# Altium PCB ADCMultiplexerFrontEnd.PcbDoc
Units mm, origin at the board's own origin, x right, y up, seen from the top; angles counter-clockwise.
Board outline 30 x 60 mm, 2 copper layers (Top Layer, Bottom Layer); 20 components, 46 nets, 152 pads, 73 vias.
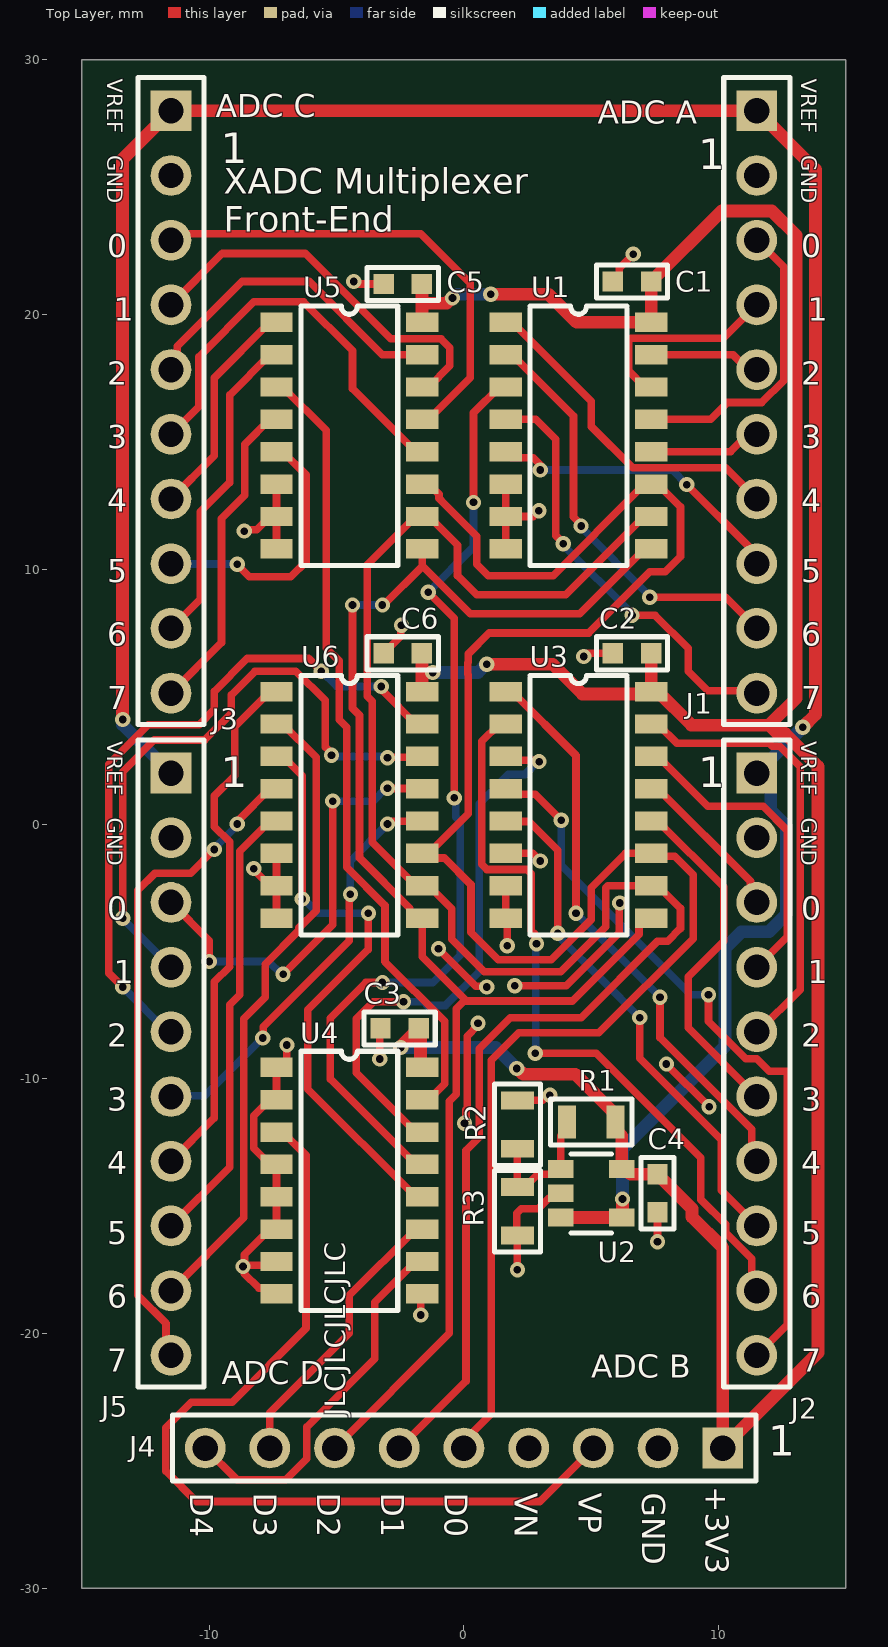
[diagram p0: Top Layer view]
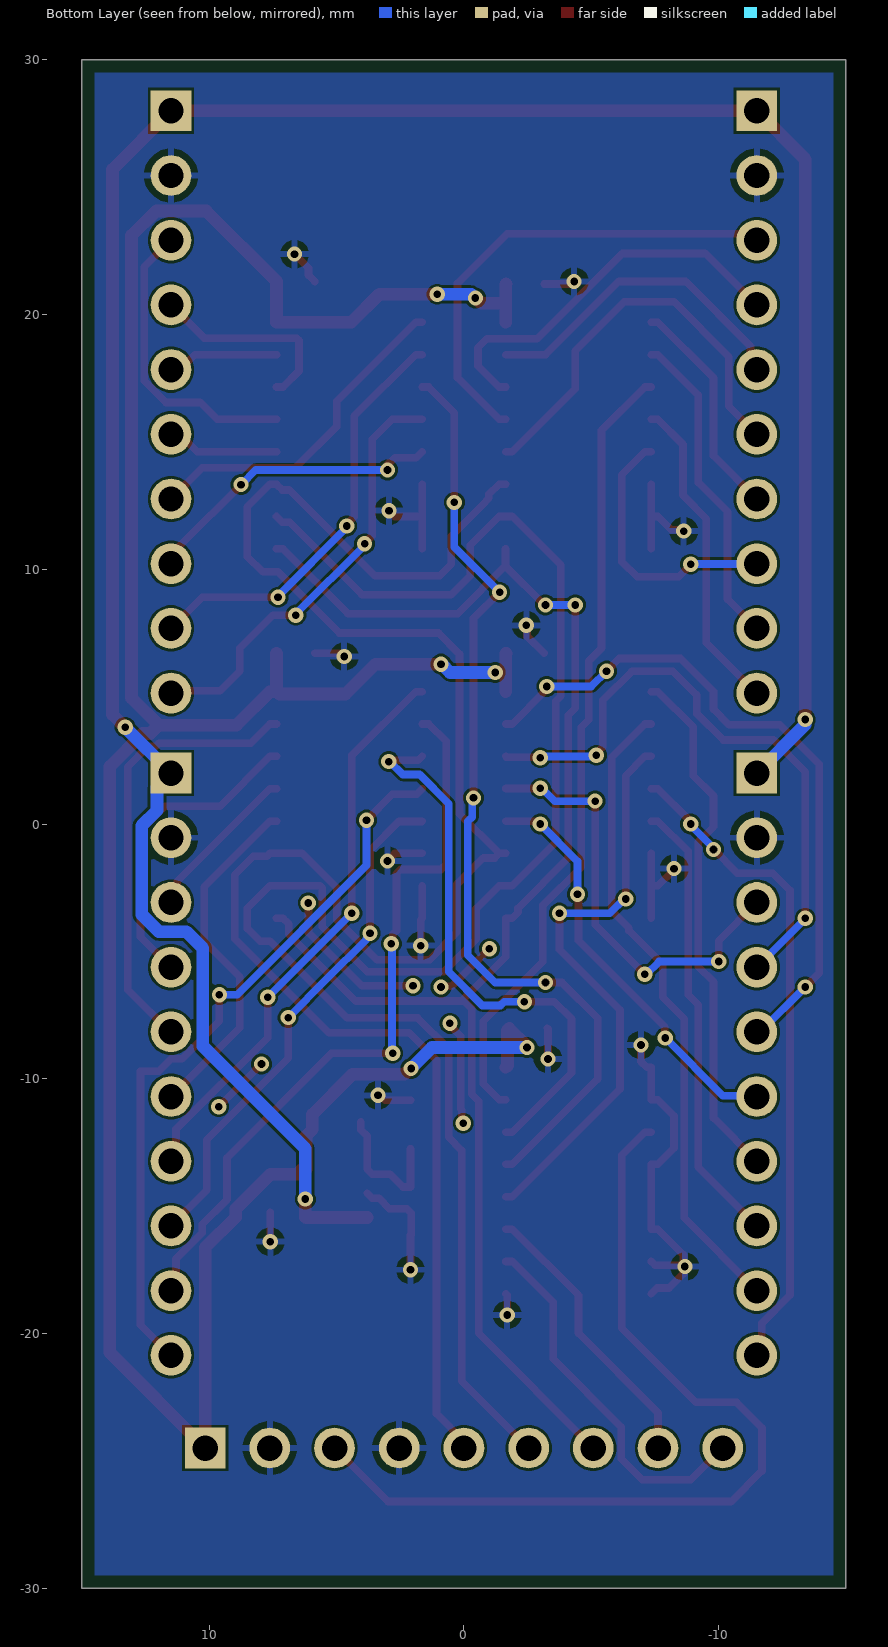
[diagram p1: Bottom Layer view, seen from below]

## Layer stack, top to bottom
Top Solder: solder mask 0.0102, Solder Resist, Dk 3.5
Top Layer: signal copper 0.0356
Dielectric 1: dielectric 0.32, FR-4, Dk 4.8
Bottom Layer: signal copper 0.0356
Bottom Solder: solder mask 0.0102, Solder Resist, Dk 3.5

## Board outline
-15,-30 15,-30 15,30 -15,30

## Design rules (kind name [scope] priority, off if disabled: settings)
Clearance [All] p1: gap=0.1 ignorepadtopadclearanceinfootprint=FALSE
HoleToHoleClearance [All] p1: gap=0.1 allowstackedmicrovias=TRUE
MinimumSolderMaskSliver [All] p1: minsoldermaskwidth=0.1
PolygonConnect [All] p1: connectstyle=Relief reliefconductorwidth=0.254 reliefentries=4 polygonreliefangle="90 Angle" airgapwidth=0.254
RoutingVias [All] p1: holewidth=0.3 width=0.6 viastyle="Through Hole" minholewidth=0.3 minwidth=0.6 maxholewidth=0.3 maxwidth=0.6
SilkToSilkClearance [All] p1: silktosilkclearance=0.1
SilkToSolderMaskClearance [IsPad] p1: minsilkscreentomaskgap=0.15 clearancetoexposedcopper=TRUE
SolderMaskExpansion [All] p1: expansion=0.102 istentingtop=FALSE
Width WidthPower [InNet('+3V3') or InNet('+1VREF')] p1: maxlimit=1 minlimit=0.5 preferedwidth=0.5 minimp=50.000000 maximp=50.000000 favimp=50.000000
Width [All] p2: maxlimit=0.5 minlimit=0.3 preferedwidth=0.3 minimp=50.000000 maximp=50.000000 favimp=50.000000
26 further rules are at their usual default settings.

## Components (designator, comment, footprint, x,y, rotation, side; value= is the part's Value field where it differs from the comment)
C1 "100n" C0603 6.6,21.3 r0 top
C2 "100n" C0603 6.6,6.7 r0 top
C3 "100n" C0603 -2.525,-8.025 r0 top
C4 "100n" C0603 7.6,-14.5 r90 top
C5 "100n" C0603 -2.4,21.2 r0 top
C6 "100n" C0603 -2.4,6.7 r0 top
J1 "HDR M 1x8 2.54MM" "HDR M 1x10 2.54MM" 11.5,28 r0 top
J2 "HDR M 1x8 2.54MM" "HDR M 1x10 2.54MM" 11.5,2 r0 top
J3 "HDR M 1x8 2.54MM" "HDR M 1x10 2.54MM" -11.5,28 r0 top
J4 "HDR M 1x8 2.54MM" "HDR M 1x9 2.54MM" 10.16,-24.5 r270 top
J5 "HDR M 1x8 2.54MM" "HDR M 1x10 2.54MM" -11.5,2 r0 top
R1 "22k" R0805 5,-11.7 r0 top
R2 "10k" R0805 2.1,-11.8 r270 top
R3 "220k" R0805 2.1,-15.2 r90 top
U1 "74HC4051D,652" SOIC16 4.5,15.25 r0 top
U2 "LMV321SN3T1G" TSOP5 5,-14.5 r0 top
U3 "74HC4051D,652" SOIC16 4.5,0.75 r0 top
U4 "74HC4051D,652" SOIC16 -4.5,-14 r0 top
U5 "74HC4051D,652" SOIC16 -4.5,15.25 r0 top
U6 "74HC4051D,652" SOIC16 -4.5,0.75 r0 top

## Footprints (in the part's own frame and the unit in brackets; to place one, negate y for a bottom-side part, rotate by r counter-clockwise, add the part's x,y. Pads: shape width x height; smd on the part's side, far side on the other; paste and mask are expansions set on the pad)
C0603 [mm]
  rect 0.8x0.8 smd: 1(-0.75,0) 2(0.75,0)
  silkscreen extent -1.4,-0.65 1.4,0.65, body extent -0.8,-0.4 0.8,0.4, height 0.96
"HDR M 1x9 2.54MM" [mm]
  rect 1.6x1.6 hole 1: 1(0,0)
  round 1.6 hole 1: 2(0,-2.54) 3(0,-5.08) 4(0,-7.62) 5(0,-10.16) 6(0,-12.7) 7(0,-15.24) 8(0,-17.78) 9(0,-20.32)
  silkscreen extent -1.3,-21.6 1.3,1.3, body extent -1.27,-21.59 1.27,1.27, height 9.21
"HDR M 1x10 2.54MM" [mm]
  rect 1.6x1.6 hole 1: 1(0,0)
  round 1.6 hole 1: 2(0,-2.54) 3(0,-5.08) 4(0,-7.62) 5(0,-10.16) 6(0,-12.7) 7(0,-15.24) 8(0,-17.78) 9(0,-20.32) 10(0,-22.86)
  silkscreen extent -1.3,-24.1 1.3,1.3, body extent -1.27,-24.1 1.27,1.27, height 9.21
R0805 [mm]
  rect 0.7x1.3 smd: 1(-0.95,0) 2(0.95,0)
  silkscreen extent -1.6,-0.9 1.6,0.9, body extent -1,-0.6 1,0.6, height 0.61
SOIC16 [mm]
  rect 1.27x0.76 smd: 1(-2.86,4.445) 2(-2.86,3.175) 3(-2.86,1.905) 4(-2.86,0.635) 5(-2.86,-0.635) 6(-2.86,-1.905) 7(-2.86,-3.175) 8(-2.86,-4.445) 9(2.86,-4.445) 10(2.86,-3.175) 11(2.86,-1.905) 12(2.86,-0.635) 13(2.86,0.635) 14(2.86,1.905) 15(2.86,3.175) 16(2.86,4.445)
  silkscreen extent -1.9,-5.1 1.9,5.08, body extent -3,-4.95 3,4.95, height 1.4
TSOP5 [mm]
  rect 1x0.7 smd mask+0.14: 1(-1.2,0.95) 2(-1.2,0) 3(-1.2,-0.95)
  rect 1x0.7 smd: 4(1.2,-0.95) 5(1.2,0.95)
  silkscreen extent -0.8,-1.55 0.8,1.55, body extent -1.41,-1.48 1.4,1.47, height 1.01

## Part data
C1 C2 C3 C4 C5 C6: library part C0603KC0G100V104
J1 J2 J3 J5: library part "HDR M 1x10 2.54MM"
J4: library part "HDR M 1x9 2.54MM"
R1: library part R0805F22K
R2: library part R0805F10K
R3: library part R0805F220K
U1 U3 U4 U5 U6: "IC MUX/DEMUX 8X1 16SOIC", Manufacturer=Nexperia, Supplier Part Number 1=1697756, Category="Decoders and Multiplexers", ComponentLink1Description=https://assets.nexperia.com/documents/data-sheet/74HC_HCT4051.pdf?src-supplier=Digi-Key, ComponentLink1URL=https://assets.nexperia.com/documents/data-sheet/74HC_HCT4051.pdf?src-supplier=Digi-Key, Manufacturer Part Number=74HC4051D,652, Pricing 1="1=0.52000, 70=0.49300, 100=0.47900, 250=0.43800, 500=0.42400 (USD)", RoHS=Yes, RoHS Compliant=Yes, Stock 1=155, Supplier 1=RSComponents
U2: "ON SEMICONDUCTOR - LMV321SN3T1G - OP-AMP, SINGLE, 1MHZ, 1V/US, TSOP-5", Case/Package=TSOP, Input Bias Current=1nA, Input Offset Voltage (Vos)=9mV, Manufacturer="ON Semiconductor", Max Operating Temperature=85°C, Max Supply Voltage=5V, Min Operating Temperature=-40°C, Min Supply Voltage=2.7V, Nominal Supply Current=250uA, Operating Supply Current=130uA, Operating Supply Voltage=3V, Output Current=160mA, Package Quantity=3000, Power Supply Rejection Ratio (PSRR)=50dB, Supplier Part Number 1=7878661, Voltage Gain=100dB, Amplifier Type="GENERAL PURPOSE", Category="Amplifiers - Op Amps, Buffer, Instrumentation", Common Mode Rejection Ratio=50dB, ComponentLink1Description=https://datasheet.ciiva.com/30481/0900766b81267f93-30481486.pdf?src-supplier=RSComponents, ComponentLink1URL=https://datasheet.ciiva.com/30481/0900766b81267f93-30481486.pdf?src-supplier=RSComponents, ComponentLink2Description=https://datasheet.ciiva.com/6627/lmv321-lmv358-lmv324-d-6627357.pdf?src-supplier=Digi-Key, ComponentLink2URL=https://datasheet.ciiva.com/6627/lmv321-lmv358-lmv324-d-6627357.pdf?src-supplier=Digi-Key, ComponentLink3Description=https://datasheet.ciiva.com/11710/lmv321-lmv358-lmv324-d-11710749.pdf?src-supplier=Avnet, ComponentLink3URL=https://datasheet.ciiva.com/11710/lmv321-lmv358-lmv324-d-11710749.pdf?src-supplier=Avnet, ComponentLink4Description=https://datasheet.ciiva.com/16456/lmv321-lmv358-lmv324-d-16456749.pdf?src-supplier=Future+Electronics, ComponentLink4URL=https://datasheet.ciiva.com/16456/lmv321-lmv358-lmv324-d-16456749.pdf?src-supplier=Future+Electronics, ComponentLink5Description=https://datasheet.ciiva.com/6627/lmv321-lmv358-lmv324-d-6627359.pdf?src-supplier=Digi-Key, ComponentLink5URL=https://datasheet.ciiva.com/6627/lmv321-lmv358-lmv324-d-6627359.pdf?src-supplier=Digi-Key, Contact Plating=Tin,Matte, Gain Bandwidth Product=1MHz, Halogen Free="Halogen Free", Height=1mm, Input Offset Voltage-Max=9mV, Lead Free="Lead Free", Length=3mm, Manufacturer Part Number=LMV321SN3T1G, Nominal Gain Bandwidth Product=1MHz, Number of Channels=1, Number of Circuits=1, Number of Elements=1, Number of Pins=5, Output Current per Channel=160mA, Packaging="Tape and Reel", Pricing 1="20=0.11000, 100=0.21500, 1000=0.15900, 3000=0.14200, 9000=0.14000 (USD)", Radiation Hardening=No, RoHS=Yes, RoHS Compliant=Yes, Series=-, Slew Rate=1V/µs, Slew Rate-Nom=1V/µs, Stock 1=3580, Supplier 1=RSComponents, Supply Current=250uA, Technology=CMOS, Unity Gain Bandwidth Product=1MHz, Width=1.5mm

## Via types
v1: diameter 0.6, hole 0.3, Top Layer to Bottom Layer, tented both sides, 73 vias

## Nets (pads, with @x,y where several pads share a name; then routed paths per layer and width w, separated by ;. In a path a pad name is that pad's centre, name@x,y a point inside that pad or via, vN(x,y) a via of type N, cw(c..) or ccw(c..) an arc to the next point about the centre after c; other vN are vias at no path point)
+1VREF: J1.1 J2.1 J3.1 J5.1 U2.3 U2.4 | length 102.1
  Top Layer w0.5: v1(-13.4,4.1) -13.4,26.1 J3.1 J1.1 13.8,25.7 13.8,4.3 v1(13.3,3.8) ; U2.3 U2.4 6.225,-15.425 v1(6.225,-14.725)
  Bottom Layer w0.5: v1(-13.4,4.1) -13.4,3.9 J5.1 ; v1(6.225,-14.725) 6.225,-12.75 10.25,-8.725 10.25,-4.877 10.897,-4.23 11.976,-4.23 12.65,-3.556 12.65,-0.064 12.05,0.536 12.05,1.45 J2.1 v1(13.3,3.8)
+3V3: C1.2 C2.2 C3.2 C4.2 C5.2 C6.2 J4.1 R1.2 U1.16 U2.5 U3.16 U4.16 U5.16 U6.16 | length 116.1
  Top Layer w0.5: v1(-2.475,-8.775) -2.456,-8.756 -2.456,-8.706 C3.2 -1.707,-8.093 -1.707,-9.487 U4.16 ; C6.2 -1.645,6.695 -1.645,5.95 ; C5.2 -1.645,21.195 -1.645,20.447 ; U6.16 -1.645,5.2 -1.645,5.947 -1.228,5.947 v1(-1.225,5.95) ; U5.16 -1.645,19.7 -1.645,20.447 ; v1(-0.45,20.65) -0.477,20.65 -0.68,20.447 -1.645,20.447 ; v1(0.9,6.275) 3.475,6.275 4.65,5.1 7.255,5.1 7.355,5.2 7.355,6.695 C2.2 ; v1(1.05,20.8) 3.322,20.8 4.427,19.695 U1.16 7.355,19.7 7.355,21.295 C1.2 10.12,24.07 12.082,24.07 13.05,23.102 13.05,4.95 11.982,3.882 ; v1(2.075,-9.6) 2.102,-9.6 2.327,-9.825 4.375,-9.825 5.95,-11.4 R1.2 5.95,-12 6.2,-12.25 U2.5 6.35,-13.55 6.55,-13.75 C4.2 8.955,-15.105 8.955,-15.427 10.16,-16.632 J4.1 13.9,-20.76 13.9,2.261 12.611,3.55 12.314,3.55 11.982,3.882 ; U3.16 7.615,5.195 8.928,3.882 11.982,3.882
  Bottom Layer w0.5: v1(-2.475,-8.775) 1.25,-8.775 v1(2.075,-9.6) ; v1(-1.225,5.95) 0.548,5.95 0.873,6.275 v1(0.9,6.275) ; v1(-0.45,20.65) -0.423,20.65 -0.273,20.8 v1(1.05,20.8)
ADC_A0: J1.3 U1.13 | length 11.8
  Top Layer w0.3: U1.13 9.685,15.885 10.35,16.55 11.699,16.55 12.55,17.401 12.55,21.87 J1.3
ADC_A1: J1.4 U1.14 | length 7.9
  Top Layer w0.3: U1.14 7.105,17.155 6.475,17.785 6.475,18.982 6.558,19.065 10.185,19.065 J1.4
ADC_A2: J1.5 U1.15 | length 4.4
  Top Layer w0.3: U1.15 10.563,18.425 11.148,17.84 J1.5
ADC_A3: J1.6 U1.12 | length 4.4
  Top Layer w0.3: U1.12 10.463,14.615 11.148,15.3 J1.6
ADC_A4: J1.7 U1.1 | length 13.3
  Top Layer w0.3: U1.1 1.895,19.695 5,16.59 5,15.606 6.621,13.985 10.275,13.985 J1.7
ADC_A5: J1.8 U1.5 | length 12
  Top Layer w0.3: U1.5 1.87,14.385 2.715,14.385 3,14.1 v1(3,13.9) ; v1(8.75,13.325) 11.094,10.981 11.094,10.978 11.5,10.572 J1.8
  Bottom Layer w0.3: v1(3,13.9) 8.175,13.9 v1(8.75,13.325)
ADC_A6: J1.9 U1.2 | length 16.7
  Top Layer w0.3: U1.2 1.895,18.425 4.3,16.02 4.3,12.066 4.6,11.766 v1(4.6,11.7) ; v1(7.3,8.9) 10.28,8.9 J1.9
  Bottom Layer w0.3: v1(4.6,11.7) 4.6,11.65 7.3,8.95 v1(7.3,8.9)
ADC_A7: J1.10 U1.4 | length 17.1
  Top Layer w0.3: U1.4 2.815,15.885 3.6,15.1 3.6,11.326 3.9,11.026 v1(3.9,11) ; v1(6.6,8.2) 7.5,8.2 8.8,6.9 8.8,6 9.575,5.225 11.415,5.225 J1.10
  Bottom Layer w0.3: v1(3.9,11) 3.9,10.95 6.6,8.25 v1(6.6,8.2)
ADC_B0: J2.3 U3.13 | length 6.3
  Top Layer w0.3: U3.13 7.615,1.385 11.251,-2.251 11.251,-2.831 J2.3
ADC_B1: J2.4 U3.14 | length 12.4
  Top Layer w0.3: U3.14 7.615,2.655 9.57,0.7 11.745,0.7 12.7,-0.255 12.7,-4.42 J2.4
ADC_B2: J2.5 U3.15 | length 17.7
  Top Layer w0.3: U3.15 7.615,3.925 8.365,3.175 11.982,3.175 12.107,3.05 12.404,3.05 13.2,2.254 13.2,-6.5 11.54,-8.16 J2.5
ADC_B3: J2.6 U3.12 | length 13.8
  Top Layer w0.3: U3.12 7.615,0.115 10.2,-2.47 10.2,-4.6 8.8,-6 8.8,-8 J2.6
ADC_B4: J2.7 U3.1 | length 22.7
  Top Layer w0.3: U3.1 1.895,5.195 4.4,2.69 v1(4.4,-3.5) ; v1(7.7,-6.8) 7.7,-8.385 11.305,-11.99 11.305,-13.045 J2.7
  Bottom Layer w0.3: v1(4.4,-3.5) v1(7.7,-6.8)
ADC_B5: J2.8 U3.5 | length 20.5
  Top Layer w0.3: U3.5 1.654,0.101 2.549,0.101 3.686,-1.036 v1(3.686,-4.286) ; v1(6.9,-7.6) 6.9,-9.2 10.1,-12.4 10.1,-14.38 J2.8
  Bottom Layer w0.3: v1(3.686,-4.286) 3.686,-4.367 3.836,-4.517 3.836,-4.536 5.4,-6.1 v1(6.9,-7.6)
ADC_B6: J2.9 U3.2 | length 29.6
  Top Layer w0.3: U3.2 1.385,3.925 0.7,3.24 0.7,-1.584 0.901,-1.785 2.474,-1.785 2.65,-1.961 2.65,-4.194 2.793,-4.336 2.793,-4.643 v1(2.85,-4.7) ; v1(2.8,-9) 5.2,-9 9.3,-13.1 9.3,-14.743 10.276,-15.719 10.276,-16.041 11.305,-17.07 11.305,-18.125 J2.9
  Bottom Layer w0.3: v1(2.8,-9) 2.825,-8.975 2.825,-4.725 v1(2.85,-4.7)
ADC_B7: J2.10 U3.4 | length 29
  Top Layer w0.3: U3.4 1.856,1.169 2.806,1.169 v1(3.825,0.15) ; v1(9.6,-6.7) 9.6,-7.745 11.065,-9.21 11.495,-9.21 11.985,-9.7 12.7,-9.7 12.7,-19.66 J2.10
  Bottom Layer w0.3: v1(3.825,0.15) 3.825,-1.625 8.9,-6.7 v1(9.6,-6.7)
ADC_C0: J3.3 U5.13 | length 18.9
  Top Layer w0.3: J3.3 -11.251,23.169 -1.694,23.169 0.25,21.225 0.25,17.52 -1.385,15.885 U5.13
ADC_C1: J3.4 U5.14 | length 15.5
  Top Layer w0.3: J3.4 -9.48,22.4 -6.225,22.4 -2.88,19.055 -0.901,19.055 -0.55,18.704 -0.55,17.99 -1.385,17.155 U5.14
ADC_C2: J3.5 U5.15 | length 12.9
  Top Layer w0.3: J3.5 -11.251,18.089 -11.251,18.749 -8.7,21.3 -6.075,21.3 -3.2,18.425 U5.15
ADC_C3: J3.6 U5.12 | length 16.5
  Top Layer w0.3: J3.6 -10.4,16.4 -10.4,18.35 -8.25,20.5 -6.3,20.5 -4.373,18.573 -4.373,17.093 -1.895,14.615 U5.12
ADC_C4: J3.7 U5.1 | length 8.8
  Top Layer w0.3: J3.7 -9.8,14.46 -9.8,17.51 -7.615,19.695 U5.1
ADC_C5: J3.8 U5.5 | length 10.7
  Top Layer w0.3: v1(-8.9,10.2) -8.9,10.174 -8.426,9.7 -6.8,9.7 -6.2,10.3 -6.2,13.71 -7.105,14.615 U5.5
  Bottom Layer w0.3: J3.8 -11.49,10.21 -8.91,10.21 v1(-8.9,10.2)
ADC_C6: J3.9 U5.2 | length 12.6
  Top Layer w0.3: J3.9 -10.35,8.83 -10.35,12.26 -9.2,13.41 -9.2,16.84 -7.615,18.425 U5.2
ADC_C7: J3.10 U5.4 | length 12.6
  Top Layer w0.3: J3.10 -9.52,7.12 -9.52,11.98 -8.6,12.9 -8.6,14.9 -7.615,15.885 U5.4
ADC_D0: J5.3 U6.13 | length 17.4
  Top Layer w0.3: J5.3 -10,-4.58 v1(-10,-5.4) ; v1(-7.1,-5.9) -5.15,-3.95 v1(-5.15,0.9) ; v1(-3,1.4) -2.992,1.392 -1.647,1.392 U6.13
  Bottom Layer w0.3: v1(-10,-5.4) -7.661,-5.4 -7.161,-5.9 v1(-7.1,-5.9) ; v1(-5.15,0.9) -3.561,0.9 -3.061,1.4 v1(-3,1.4)
ADC_D1: J5.4 U6.14 | length 24.8
  Top Layer w0.3: v1(-13.4,-3.7) -13.4,2.054 -12.154,3.3 -10.176,3.3 -9.137,4.339 -9.137,5.063 -8.2,6 -6.6,6 -5.45,4.85 -5.45,3.026 -5.2,2.776 v1(-5.2,2.7) ; v1(-3,2.6) -2.973,2.627 -1.667,2.627 U6.14
  Bottom Layer w0.3: v1(-13.4,-3.7) -13.4,-3.72 J5.4 ; v1(-5.2,2.7) -5.15,2.65 -3.05,2.65 v1(-3,2.6)
ADC_D2: J5.5 U6.15 | length 27.2
  Top Layer w0.3: v1(-13.4,-6.4) -13.95,-5.85 -13.95,2.35 -12.4,3.9 -10.4,3.9 -9.8,4.5 -9.8,5.2 -8.5,6.5 -6.1,6.5 v1(-5.6,6) ; v1(-3.25,5.4) -3.193,5.343 -3.193,5.223 -1.895,3.925 U6.15
  Bottom Layer w0.3: v1(-13.4,-6.4) -11.64,-8.16 J5.5 ; v1(-5.6,6) -5,5.4 v1(-3.25,5.4)
ADC_D3: J5.6 U6.12 | length 16.4
  Top Layer w0.3: v1(-7.9,-8.4) -7.882,-8.382 -7.882,-7.958 -4.5,-4.576 -4.5,-3.012 -4.457,-2.97 v1(-4.457,-2.757) ; v1(-3,0) -2.919,0 -2.811,0.107 -1.647,0.107 U6.12
  Bottom Layer w0.3: J5.6 -11.469,-10.669 -10.169,-10.669 v1(-7.9,-8.4) ; v1(-4.457,-2.757) -4.457,-1.457 v1(-3,0)
ADC_D4: J5.7 U6.1 | length 20.8
  Top Layer w0.3: J5.7 -9.8,-11.54 -9.8,-6.2 -9.2,-5.6 -9.2,-0.7 -9.8,-0.1 -9.8,1.1 -9,1.9 -9,3.81 -7.615,5.195 U6.1
ADC_D5: J5.8 U6.5 | length 17.8
  Top Layer w0.3: J5.8 -9.2,-13.48 -9.2,-7.1 -8.8,-6.7 -8.8,-1.07 -7.615,0.115 U6.5
ADC_D6: J5.9 U6.2 | length 25.4
  Top Layer w0.3: J5.9 -8.645,-15.465 -8.645,-7.645 -7.8,-6.8 -7.8,-5.504 -6.475,-4.179 -6.475,-4.075 -5.8,-3.4 -5.8,2.62 -7.105,3.925 U6.2
ADC_D7: J5.10 U6.4 | length 26
  Top Layer w0.3: J5.10 -11.695,-20.665 -11.695,-19.61 -12.8,-18.505 -12.8,-2.6 -12.129,-1.929 -10.729,-1.929 v1(-9.8,-1) ; v1(-8.9,0) -8.843,0.057 -8.843,0.157 -7.615,1.385 U6.4
  Bottom Layer w0.3: v1(-9.8,-1) -9.8,-0.95 -8.9,-0.05 v1(-8.9,0)
D0: J4.5 U1.11 U3.11 U5.11 U6.11 | length 78.9
  Top Layer w0.3: U6.11 U6.11@-1.385,-1.155 ; U5.11 -1.385,13.345 -0.979,12.939 -0.979,12.783 -0.755,12.559 0.5,11.304 0.5,10.2 0.95,9.75 3.5,9.75 6.865,13.115 7.13,13.115 U1.11 7.615,13.345 8.5,12.46 8.5,10.5 7.9,9.9 7.3,9.9 4.9,7.5 1,7.5 0.175,6.675 0.175,6.353 0.15,6.328 0.15,5.872 0.175,5.847 0.175,0.405 U6.11@-1.385,-1.155 ; J4.5 0,-24.232 1.075,-23.157 1.075,-9.275 2.15,-8.2 5.3,-8.2 9,-4.5 9,-2 8.269,-1.269 7.729,-1.269 7.615,-1.155 U3.11 6.345,-1.155 5,-2.5 5,-3.75 3.425,-5.325 1.35,-5.325 0.275,-4.25 0.275,-2.375 -0.767,-1.333 -1.207,-1.333 U6.11@-1.385,-1.155
D1: J4.6 U1.10 U3.10 U5.10 U6.10 | length 71.4
  Top Layer w0.3: J4.6 0.08,-21.88 0.08,-12.82 0.6,-12.3 0.6,-8.825 1.825,-7.6 4.6,-7.6 7.6,-4.6 8,-4.6 8.5,-4.1 8.5,-3.31 7.615,-2.425 5.641,-2.425 5.562,-2.503 5.562,-4.038 3.8,-5.8 0.8,-5.8 -0.475,-4.525 -0.475,-3.335 -1.385,-2.425 U6.10 -1.895,-2.425 -3.6,-0.72 -3.6,4.822 -3.8,5.022 -3.8,10.17 -1.895,12.075 -1.385,12.075 -0.25,10.94 -0.25,9.75 0.5,9 4,9 6.845,11.845 7.13,11.845 U1.10
D2: J4.7 U1.9 U3.9 U5.9 U6.9 | length 61
  Top Layer w0.3: J4.7 -0.575,-19.995 -0.575,-10.887 -0.3,-10.612 -0.3,-7.25 0.05,-6.9 -1.64,-5.21 U6.9 -1.895,-3.695 -2.125,-3.465 -2.125,-3.309 -4.1,-1.334 -4.1,4.275 -4.375,4.55 v1(-4.375,8.6) ; v1(-3.2,8.6) -3.15,8.6 -1.64,10.11 ; U5.9 -1.631,10.796 -1.631,10.131 0.25,8.25 4.55,8.25 7.105,10.805 U1.9 ; 0,-6.95 4.25,-6.95 6.875,-4.325 6.875,-3.925 7.105,-3.695 U3.9
  Bottom Layer w0.3: v1(-4.375,8.6) v1(-3.2,8.6)
D3: J4.8 U4.11 | length 11.2
  Top Layer w0.3: J4.8 -7.62,-23.12 -4.5,-20 -4.5,-18.51 -1.895,-15.905 U4.11
D4: J4.9 U4.10 | length 14.6
  Top Layer w0.3: J4.9 -8.91,-25.75 -7,-25.75 -6.175,-24.925 -6.175,-23.675 -3.5,-21 -3.5,-18.78 -1.895,-17.175 U4.10
GND: C1.1 C2.1 C3.1 C4.1 C5.1 C6.1 J1.2 J2.2 J3.2 J4.2 J4.4 J5.2 R2.1 R3.1 U1.6 U1.7 U1.8 U2.2 U3.6 U3.7 U3.8 U4.1 U4.2 U4.4 U4.5 U4.6 U4.7 U4.8 U4.9 U5.6 U5.7 U5.8 U6.6 U6.7 U6.8 | length 43.5
  Top Layer w0.3: v1(-8.625,11.5) -8.568,11.557 -8.133,11.557 -7.615,12.075 U5.7 ; v1(-8.25,-1.75) -8.25,-1.79 -7.615,-2.425 U6.7 ; U4.8 -7.59,-18.215 -8.06,-18.215 -8.618,-17.657 -8.618,-17.432 v1(-8.675,-17.375) v1@-8.618,-17.318 ; U4.7 -7.503,-17.318 v1@-8.618,-17.318 ; U6.8 U6.7 ; U6.6 U6.7 ; U5.8 U5.7 ; U5.6 U5.7 ; v1(-6.95,-8.675) -6.95,-9.325 -7.18,-9.555 U4.1 U4.2 -7.615,-10.825 -8.245,-11.455 -8.245,-12.735 -7.615,-13.365 U4.4 U4.5 U4.6 -7.615,-15.905 -8.618,-16.908 v1@-8.618,-17.318 ; v1(-4.325,21.3) -4.225,21.2 C5.1 ; v1(-3.3,-9.225) -3.3,-8.05 C3.1 ; C6.1 -2.476,7.374 -2.476,7.774 v1(-2.45,7.8) ; v1(-1.7,-19.275) -1.7,-18.505 U4.9 ; U3.7 U3.8 1.7,-3.755 v1(1.7,-4.775) ; U3.6 2.705,-1.155 v1(3,-1.45) ; U1.8 U1.7 ; U1.6 U1.7 ; v1(2.1,-17.5) R3.1 2.075,-16.125 2.075,-15.276 2.251,-15.1 2.925,-15.1 3.325,-14.7 3.6,-14.7 U2.2 ; R2.1 3.094,-10.85 3.294,-10.65 v1(3.375,-10.65) ; v1(2.944,12.3) 2.719,12.075 U1.7 ; v1(4.7,6.575) 4.825,6.7 C2.1 ; C1.1 6.1,21.55 6.1,21.825 v1(6.65,22.375) ; v1(7.6,-16.4) C4.1
NetR1_1: R1.1 R2.2 R3.2 U2.1 | length 5.4
  Top Layer w0.3: R2.2 R3.2 2.4,-14.25 2.9,-13.75 3.6,-13.75 U2.1 3.8,-12.25 4.05,-12 R1.1
NetU1_3: U1.3 U4.13 | length 37.7
  Top Layer w0.3: v1(-3.2,-6.225) -3.85,-6.225 -5.25,-7.625 -5.25,-10.01 -1.895,-13.365 U4.13 ; v1(-1.4,9.1) -0.375,8.075 v1(-0.375,1.025) ; v1(0.375,12.625) 0.375,16.145 1.385,17.155 U1.3
  Bottom Layer w0.3: v1(-3.2,-6.225) -1.225,-6.225 -0.15,-5.15 -0.15,0.1 -0.325,0.275 -0.325,0.975 v1(-0.375,1.025) ; v1(-1.4,9.1) 0.375,10.875 v1(0.375,12.625)
NetU3_3: U3.3 U4.14 | length 22.4
  Top Layer w0.3: v1(-2.375,-6.975) -3.55,-6.975 -4.225,-7.65 -4.225,-9.765 -1.895,-12.095 U4.14 ; U3.3 1.788,2.507 2.893,2.507 v1(2.95,2.45)
  Bottom Layer w0.3: v1(-2.375,-6.975) -1.584,-6.975 -1.434,-7.125 -0.725,-7.125 0.6,-5.8 0.6,0.8 1.743,1.943 2.397,1.943 2.904,2.45 v1(2.95,2.45)
NetU4_12: U4.12 U6.3 | length 23.1
  Top Layer w0.3: U6.3 -7.105,2.655 -6.35,1.9 v1(-6.35,-2.944) ; v1(-3.75,-3.5) -3.75,-4.925 -6.125,-7.3 -6.125,-10.405 -1.895,-14.635 U4.12
  Bottom Layer w0.3: v1(-6.35,-2.944) -6.286,-2.944 -5.73,-3.5 v1(-3.75,-3.5)
NetU4_15: U4.15 U5.3 | length 31.4
  Top Layer w0.3: U5.3 -7.105,17.155 -5.4,15.45 -5.4,6.9 -4.9,6.4 -4.9,4.1 -4.6,3.8 -4.6,-1.7 -3.1,-3.2 -3.1,-5.4 -0.755,-7.745 -0.755,-10.195 -1.385,-10.825 U4.15
XADC_VP: J4.3 U4.3 | length 35.3
  Top Layer w0.3: U4.3 -7.105,-12.095 -6.2,-13 -6.2,-19.8 -9.1,-22.7 -10.7,-22.7 -11.7,-23.7 -11.7,-25.4 -10.5,-26.6 2.98,-26.6 J4.3
copper on no net: | length 15.3
  Top Layer w0.3: v1(-1,-4.9) 0.47,-6.37 0.87,-6.37 v1(0.9,-6.4) ; v1(0.025,-11.75) 0.082,-11.693 0.082,-11.218 0.125,-11.175 0.125,-8.673 0.125,-8.331 0.55,-7.906 v1(0.55,-7.825) ; v1(2,-6.35) 4.016,-6.35 6.1,-4.266 6.1,-3.2 6.1,-3.112 v1(6.112,-3.1) ; v1(7.95,-9.425) v1(9.625,-11.1)
  Bottom Layer w0.3: v1@1.9,-6.3 1.95,-6.3 v1(2,-6.35)

## Polygon pours and split planes (outlines as drawn)
GND on Bottom Layer "GND_L02_P000" (solid, pour order 0): 14.5,-29.5 14.5,29.5 -14.5,29.5 -14.5,-29.5

## Silkscreen, mask and mechanical layers (free items; w line width, h text height)
Top Overlay:
  text "VREF" at -14,29.25 h0.6 r270
  text "VREF" at 13.25,29.25 h0.6 r270
  text "ADC C" at -9.75,27.75 h0.9
  text "ADC A" at 5.25,27.5 h0.9
  text "GND" at -14,26.25 h0.6 r270
  text "GND" at 13.25,26.25 h0.6 r270
  text "XADC Multiplexer / Front-End" at -9.424,23.25 h1
  text "0" at -14,22.25 h0.9
  text "0" at 13.25,22.25 h0.9
  text "1" at -13.75,19.75 h0.9
  text "1" at 13.5,19.75 h0.9
  text "2" at -14,17.25 h0.9
  text "2" at 13.25,17.25 h0.9
  text "3" at -14,14.75 h0.9
  text "3" at 13.25,14.75 h0.9
  text "4" at -14,12.25 h0.9
  text "4" at 13.25,12.25 h0.9
  text "5" at -14,9.5 h0.9
  text "5" at 13.25,9.5 h0.9
  text "6" at -14,7 h0.9
  text "6" at 13.25,7 h0.9
  text "7" at -14,4.5 h0.9
  text "7" at 13.25,4.5 h0.9
  text "VREF" at -14,3.25 h0.6 r270
  text "VREF" at 13.25,3.25 h0.6 r270
  text "GND" at -14,0.25 h0.6 r270
  text "GND" at 13.25,0.25 h0.6 r270
  text "0" at -14,-3.75 h0.9
  text "0" at 13.25,-3.75 h0.9
  text "1" at -13.75,-6.25 h0.9
  text "1" at 13.5,-6.25 h0.9
  text "2" at -14,-8.75 h0.9
  text "2" at 13.25,-8.75 h0.9
  text "3" at -14,-11.25 h0.9
  text "3" at 13.25,-11.25 h0.9
  text "4" at -14,-13.75 h0.9
  text "4" at 13.25,-13.75 h0.9
  text "5" at -14,-16.5 h0.9
  text "5" at 13.25,-16.5 h0.9
  text "6" at -14,-19 h0.9
  text "6" at 13.25,-19 h0.9
  text "7" at -14,-21.5 h0.9
  text "7" at 13.25,-21.5 h0.9
  text "ADC B" at 5,-21.75 h0.9
  text "ADC D" at -9.5,-22 h0.9
  text "JLCJLCJLCJLC" at -4.65,-23.247 h0.8 r90
  text "+3V3" at 9.5,-26 h0.9 r270
  text "D4" at -10.75,-26.25 h0.9 r270
  text "D3" at -8.25,-26.25 h0.9 r270
  text "D2" at -5.75,-26.25 h0.9 r270
  text "D1" at -3.25,-26.25 h0.9 r270
  text "D0" at -0.75,-26.25 h0.9 r270
  text "VN" at 2,-26.25 h0.9 r270
  text "VP" at 4.5,-26.25 h0.9 r270
  text "GND" at 7,-26.25 h0.9 r270
Board Outline:
  the board outline again, w0.2

## Text inside footprints (layer, text, board x,y; h text height)
J1: Top Overlay "1" at 9.2,25.7 h1.2
J2: Top Overlay "1" at 9.2,1.45 h1.2
J3: Top Overlay "1" at -9.55,25.95 h1.2
J4: Top Overlay "1" at 11.95,-24.8 h1.2
J5: Top Overlay "1" at -9.55,1.45 h1.2